# Altium PCB HLK-7621-ALL-KIT-V1.0.PcbDoc (part 2 of 2)
Units mm, origin at the board's own origin, x right, y up, seen from the top; angles counter-clockwise.
Board outline 140 x 100 mm, 2 copper layers (Top Layer, Bottom Layer); 111 components, 238 nets, 733 pads, 557 vias.
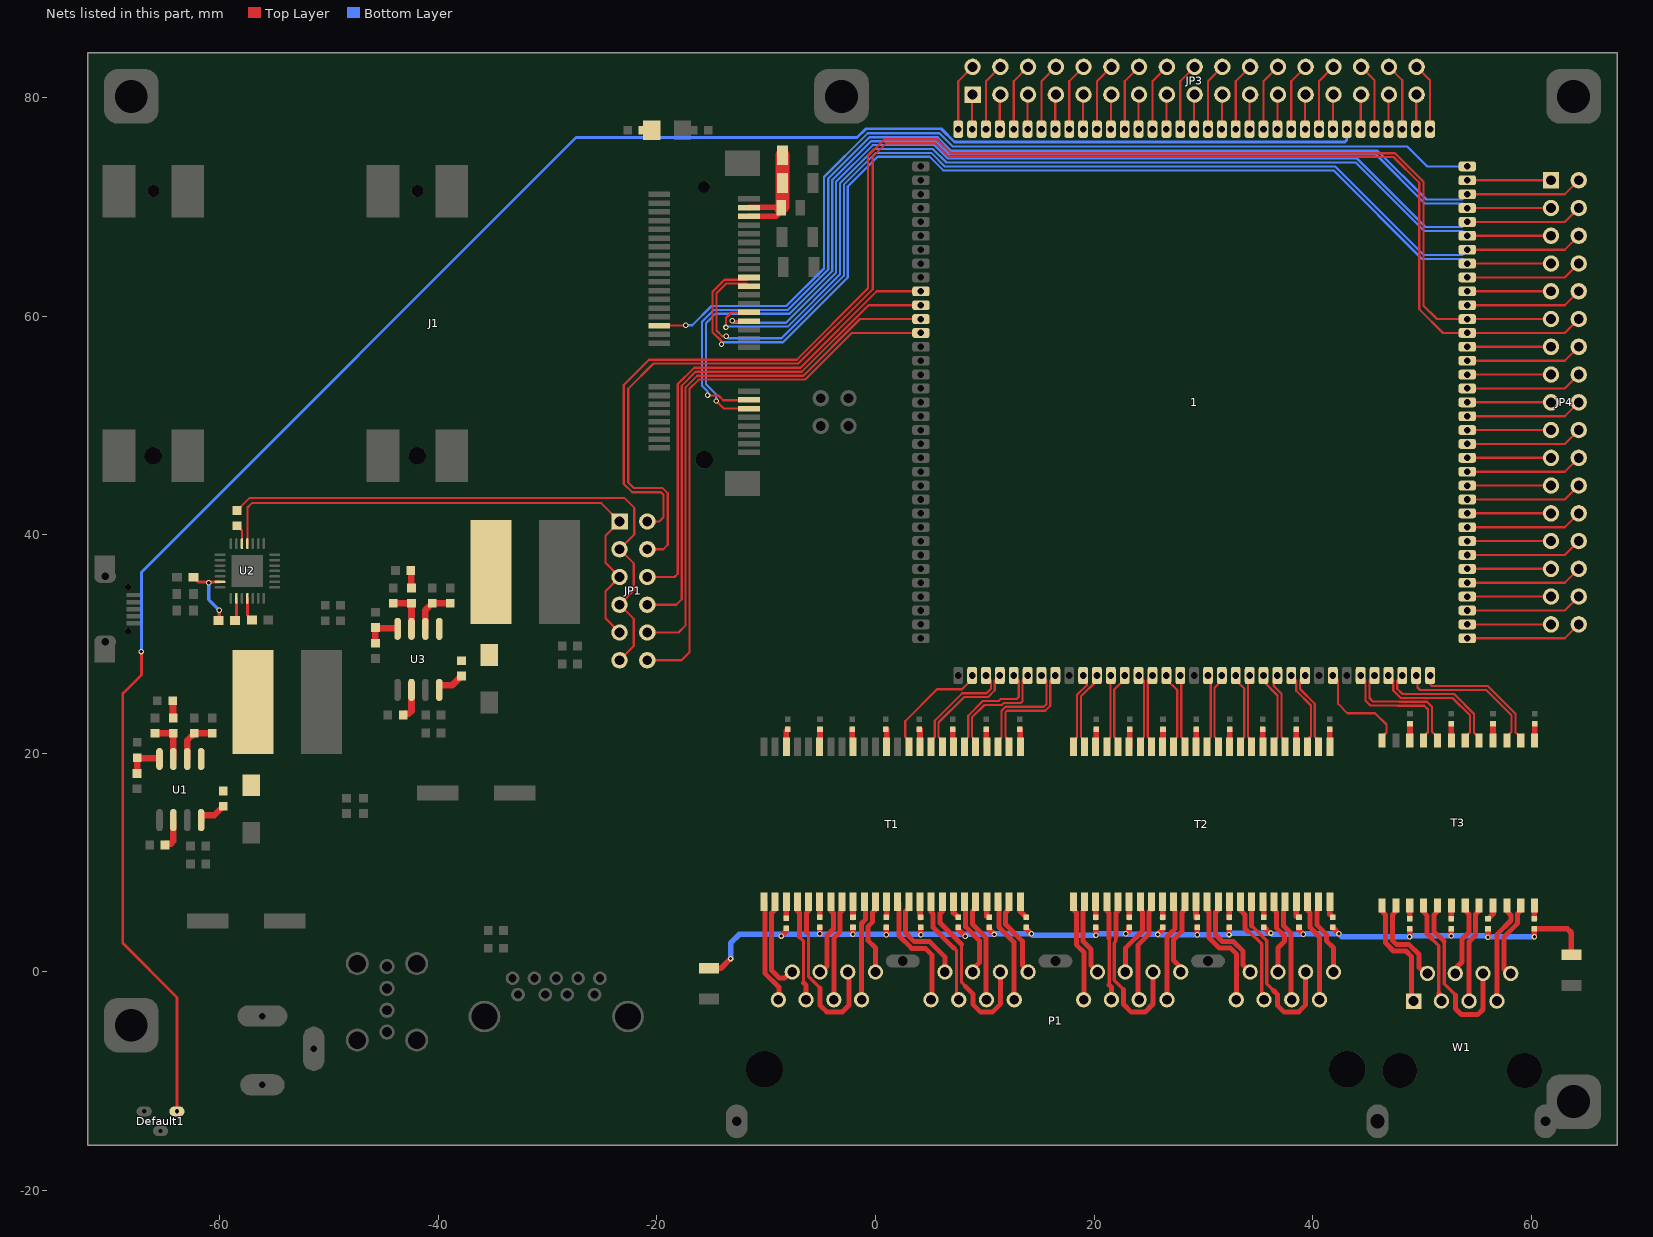
[diagram p2: the nets of this part, all layers, seen from the top]

## Via types
v1: diameter 0.5, hole 0.3, Top Layer to Bottom Layer, tented both sides, 557 vias

## Nets (pads, with @x,y where several pads share a name; then routed paths per layer and width w, separated by ;. In a path a pad name is that pad's centre, name@x,y a point inside that pad or via, vN(x,y) a via of type N, cw(c..) or ccw(c..) an arc to the next point about the centre after c; other vN are vias at no path point) (continued)
Net1_37: 1.37 T1.11 | length 10.5
  Top Layer w0.203: T1.11@3.054,20.613 3.054,21.188 2.717,21.525 2.717,22.948 5.636,25.867 7.924,25.867 8.842,26.785 1.37@8.842,27.135
Net1_38: 1.38 T1.9 | length 10.3
  Top Layer w0.203: T1.9@5.094,20.613 5.094,21.167 5.421,21.494 5.421,22.985 7.948,25.512 10.157,25.512 10.564,25.918 10.564,26.683 1.38@10.112,27.135
Net1_39: 1.39 T1.8 | length 10.3
  Top Layer w0.203: T1.8@6.114,20.613 6.114,21.188 5.777,21.525 5.777,22.838 8.095,25.156 10.305,25.156 10.924,25.776 10.924,26.678 1.39@11.382,27.135
Net1_40: 1.40 T1.6 | length 10.5
  Top Layer w0.203: T1.6@8.154,20.613 8.154,21.167 8.481,21.494 8.481,23.454 9.827,24.801 11.285,24.801 11.463,24.978 12.921,24.978 13.104,25.161 13.104,26.683 1.40@12.652,27.135
Net1_41: 1.41 T1.5 | length 10.6
  Top Layer w0.203: T1.5@9.174,20.613 9.174,21.188 8.837,21.525 8.837,23.307 9.975,24.445 11.551,24.445 11.729,24.623 13.306,24.623 13.459,24.777 13.459,26.673 1.41@13.922,27.135
Net1_42: 1.42 T1.3 | length 10.6
  Top Layer w0.203: T1.3@11.214,20.613 11.214,21.167 11.541,21.494 11.541,23.918 11.89,24.267 15.395,24.267 15.644,24.516 15.644,26.683 1.42@15.192,27.135
Net1_43: 1.43 T1.2 | length 10.6
  Top Layer w0.203: T1.2@12.234,20.613 12.234,21.188 11.897,21.525 11.897,23.771 12.037,23.912 15.542,23.912 15.999,24.369 15.999,26.673 1.43@16.462,27.135
Net1_45: 1.45 T2.24 | length 7.2
  Top Layer w0.203: T2.24@18.115,20.613 18.115,21.167 18.442,21.494 18.442,25.364 19.327,26.248 19.327,26.81 1.45@19.002,27.135
Net1_46: 1.46 T2.23 | length 7.3
  Top Layer w0.203: T2.23@19.135,20.613 19.135,21.188 18.798,21.525 18.798,25.211 20.272,26.685 1.46@20.272,27.135
Net1_47: 1.47 T2.21 | length 6.7
  Top Layer w0.203: T2.21@21.175,20.613 21.175,21.167 21.502,21.494 21.502,27.095 1.47@21.542,27.135
Net1_48: 1.48 T2.20 | length 7.1
  Top Layer w0.203: T2.20@22.195,20.613 22.195,21.188 21.858,21.525 21.858,25.858 22.812,26.812 1.48@22.812,27.135
Net1_49: 1.49 T2.18 | length 6.9
  Top Layer w0.203: 1.49@24.082,27.135 24.562,26.655 24.562,21.494 24.235,21.167 T2.18@24.235,20.613
Net1_50: 1.50 T2.17 | length 6.8
  Top Layer w0.203: T2.17@25.255,20.613 25.255,21.188 24.918,21.525 24.918,26.701 1.50@25.352,27.135
Net1_51: 1.51 T2.15 | length 7.1
  Top Layer w0.203: 1.51@26.622,27.135 26.622,26.802 27.622,25.802 27.622,21.494 27.295,21.167 T2.15@27.295,20.613
Net1_52: 1.52 T2.14 | length 6.7
  Top Layer w0.203: 1.52@27.892,27.135 27.978,27.049 27.978,21.525 28.315,21.188 T2.14@28.315,20.613
Net1_54: 1.54 T2.12 | length 6.8
  Top Layer w0.203: T2.12@30.355,20.613 30.355,21.167 30.682,21.494 30.682,26.885 1.54@30.432,27.135
Net1_55: 1.55 T2.11 | length 6.9
  Top Layer w0.203: T2.11@31.375,20.613 31.375,21.188 31.038,21.525 31.038,26.047 31.702,26.711 1.55@31.702,27.135
Net1_56: 1.56 T2.9 | length 7
  Top Layer w0.203: 1.56@32.972,27.135 32.972,26.726 33.742,25.956 33.742,21.494 33.415,21.167 T2.9@33.415,20.613
Net1_57: 1.57 T2.8 | length 6.7
  Top Layer w0.203: 1.57@34.242,27.135 34.098,26.991 34.098,21.525 34.435,21.188 T2.8@34.435,20.613
Net1_58: 1.58 T2.6 | length 7.2
  Top Layer w0.203: 1.58@35.512,27.135 35.512,26.604 36.802,25.314 36.802,21.494 36.475,21.167 T2.6@36.475,20.613
Net1_59: 1.59 T2.5 | length 7.1
  Top Layer w0.203: 1.59@36.782,27.135 36.446,26.8 36.446,26.172 37.158,25.461 37.158,21.525 37.495,21.188 T2.5@37.495,20.613
Net1_60: 1.60 T2.3 | length 7.4
  Top Layer w0.203: 1.60@38.052,27.135 38.504,26.683 38.504,25.745 39.85,24.399 39.85,21.596 39.535,21.281 T2.3@39.535,20.613
Net1_61: 1.61 T2.2 | length 7.4
  Top Layer w0.203: 1.61@39.322,27.135 38.859,26.673 38.859,25.893 40.206,24.547 40.206,21.55 40.555,21.201 T2.2@40.555,20.613
Net1_63: 1.63 T3.12 | length 9.6
  Top Layer w0.203: 1.63@41.862,27.135 41.884,27.135 42.339,26.68 42.339,24.537 43.188,23.688 45.718,23.688 46.759,22.647 46.759,21.914 46.355,21.51 T3.12@46.355,21.19
Net1_65: 1.65 T3.9 | length 11.5
  Top Layer w0.203: 1.65@44.402,27.135 44.854,26.683 44.854,24.831 45.286,24.399 47.76,24.399 47.79,24.369 50.216,24.369 50.569,24.016 50.569,21.972 50.165,21.568 T3.9@50.165,21.19
Net1_66: 1.66 T3.8 | length 11.6
  Top Layer w0.203: 1.66@45.672,27.135 45.209,26.673 45.209,25.072 45.519,24.762 47.9,24.762 47.937,24.724 50.472,24.724 50.924,24.272 50.924,21.99 51.435,21.48 T3.8@51.435,21.19
Net1_67: 1.67 T3.6 | length 12
  Top Layer w0.203: 1.67@46.942,27.135 47.394,26.683 47.394,25.771 48.085,25.08 52.809,25.08 54.404,23.485 54.404,21.939 53.975,21.51 T3.6@53.975,21.19
Net1_68: 1.68 T3.5 | length 12
  Top Layer w0.203: 1.68@48.212,27.135 47.749,26.673 47.749,25.918 48.232,25.436 52.956,25.436 54.785,23.607 54.785,21.897 55.245,21.438 T3.5@55.245,21.19
Net1_69: 1.69 T3.3 | length 13.3
  Top Layer w0.203: 1.69@49.482,27.135 49.598,27.019 49.598,26.03 49.825,25.804 55.895,25.804 58.214,23.485 58.214,21.981 57.785,21.552 T3.3@57.785,21.19
Net1_70: 1.70 T3.2 | length 12.4
  Top Layer w0.203: 1.70@50.752,27.135 50.752,26.35 50.929,26.172 56.03,26.172 58.57,23.632 58.57,21.939 59.055,21.454 T3.2@59.055,21.19
Net1_71: 1.71 JP4.34 | length 10.7
  Top Layer w0.203: 1.71@54.162,30.545 63.091,30.545 JP4.34@64.361,31.815
Net1_72: 1.72 JP4.33 | length 7.7
  Top Layer w0.203: 1.72@54.162,31.815 JP4.33@61.821,31.815
Net1_73: 1.73 JP4.32 | length 10.7
  Top Layer w0.203: 1.73@54.162,33.085 63.091,33.085 JP4.32@64.361,34.355
Net1_74: 1.74 JP4.31 | length 7.7
  Top Layer w0.203: 1.74@54.162,34.355 JP4.31@61.821,34.355
Net1_75: 1.75 JP4.30 | length 10.7
  Top Layer w0.203: 1.75@54.162,35.625 63.091,35.625 JP4.30@64.361,36.895
Net1_76: 1.76 JP4.29 | length 7.7
  Top Layer w0.203: 1.76@54.162,36.895 JP4.29@61.821,36.895
Net1_77: 1.77 JP4.28 | length 10.7
  Top Layer w0.203: 1.77@54.162,38.165 63.091,38.165 JP4.28@64.361,39.435
Net1_78: 1.78 JP4.27 | length 7.7
  Top Layer w0.203: 1.78@54.162,39.435 JP4.27@61.821,39.435
Net1_79: 1.79 JP4.26 | length 10.7
  Top Layer w0.203: 1.79@54.162,40.705 63.091,40.705 JP4.26@64.361,41.975
Net1_80: 1.80 JP4.25 | length 7.7
  Top Layer w0.203: 1.80@54.162,41.975 JP4.25@61.821,41.975
Net1_81: 1.81 JP4.24 | length 10.7
  Top Layer w0.203: 1.81@54.162,43.245 63.091,43.245 JP4.24@64.361,44.515
Net1_82: 1.82 JP4.23 | length 7.7
  Top Layer w0.203: 1.82@54.162,44.515 JP4.23@61.821,44.515
Net1_83: 1.83 JP4.22 | length 10.7
  Top Layer w0.203: 1.83@54.162,45.785 63.091,45.785 JP4.22@64.361,47.055
Net1_84: 1.84 JP4.21 | length 7.7
  Top Layer w0.203: 1.84@54.162,47.055 JP4.21@61.821,47.055
Net1_85: 1.85 JP4.20 | length 10.7
  Top Layer w0.203: 1.85@54.162,48.325 63.091,48.325 JP4.20@64.361,49.595
Net1_86: 1.86 JP4.19 | length 7.7
  Top Layer w0.203: 1.86@54.162,49.595 JP4.19@61.821,49.595
Net1_87: 1.87 JP4.18 | length 10.7
  Top Layer w0.203: 1.87@54.162,50.865 63.091,50.865 JP4.18@64.361,52.135
Net1_88: 1.88 JP4.17 | length 7.7
  Top Layer w0.203: 1.88@54.162,52.135 JP4.17@61.821,52.135
Net1_89: 1.89 JP4.16 | length 10.7
  Top Layer w0.203: 1.89@54.162,53.405 63.091,53.405 JP4.16@64.361,54.675
Net1_90: 1.90 JP4.15 | length 7.7
  Top Layer w0.203: 1.90@54.162,54.675 JP4.15@61.821,54.675
Net1_91: 1.91 JP4.14 | length 10.7
  Top Layer w0.203: 1.91@54.162,55.945 63.091,55.945 JP4.14@64.361,57.215
Net1_92: 1.92 JP4.13 | length 7.7
  Top Layer w0.203: 1.92@54.162,57.215 JP4.13@61.821,57.215
Net1_95: 1.95 JP4.10 | length 10.7
  Top Layer w0.203: 1.95@54.162,61.025 63.091,61.025 JP4.10@64.361,62.295
Net1_96: 1.96 JP4.9 | length 7.7
  Top Layer w0.203: 1.96@54.162,62.295 JP4.9@61.821,62.295
Net1_97: 1.97 JP4.8 | length 10.7
  Top Layer w0.203: 1.97@54.162,63.565 63.091,63.565 JP4.8@64.361,64.835
Net1_104: 1.104 JP4.1 | length 7.7
  Top Layer w0.203: 1.104@54.162,72.455 JP4.1@61.821,72.455
Net1_106: 1.106 JP3.34 | length 6.2
  Top Layer w0.203: JP3.34@49.527,82.84 50.752,81.615 1.106@50.752,77.135
Net1_107: 1.107 JP3.33 | length 3.2
  Top Layer w0.203: 1.107@49.482,77.135 49.482,80.254 JP3.33@49.527,80.3
Net1_108: 1.108 JP3.32 | length 6.2
  Top Layer w0.203: JP3.32@46.987,82.84 48.212,81.615 1.108@48.212,77.135
Net1_109: 1.109 JP3.31 | length 3.2
  Top Layer w0.203: 1.109@46.942,77.135 46.942,80.254 JP3.31@46.987,80.3
Net1_110: 1.110 JP3.30 | length 6.2
  Top Layer w0.203: JP3.30@44.447,82.84 45.672,81.615 1.110@45.672,77.135
Net1_111: 1.111 JP3.29 | length 3.2
  Top Layer w0.203: 1.111@44.402,77.135 44.402,80.254 JP3.29@44.447,80.3
Net1_112: 1.112 Default1.1 | length 180.5
  Top Layer w0.254: v1(-67.186,29.322) -67.186,27.183 -68.882,25.486 -68.882,2.626 -63.928,-2.328 Default1.1@-63.928,-12.471
  Bottom Layer w0.254: v1(-67.186,29.322) -67.186,36.586 -27.409,76.363 -1.695,76.363 -0.882,77.175 6.018,77.175 7.238,75.956 42.954,75.956 43.132,76.134 1.112@43.132,77.135
Net1_113: 1.113 JP3.27 | length 3.2
  Top Layer w0.203: 1.113@41.862,77.135 41.862,80.254 JP3.27@41.907,80.3
Net1_114: 1.114 JP3.28 | length 6.2
  Top Layer w0.203: 1.114@40.592,77.135 40.592,81.524 JP3.28@41.907,82.84
Net1_115: 1.115 JP3.25 | length 3.2
  Top Layer w0.203: 1.115@39.322,77.135 39.322,80.254 JP3.25@39.367,80.3
Net1_116: 1.116 JP3.26 | length 6.2
  Top Layer w0.203: 1.116@38.052,77.135 38.052,81.524 JP3.26@39.367,82.84
Net1_117: 1.117 JP3.23 | length 3.2
  Top Layer w0.203: 1.117@36.782,77.135 36.782,80.254 JP3.23@36.827,80.3
Net1_118: 1.118 JP3.24 | length 6.2
  Top Layer w0.203: 1.118@35.512,77.135 35.512,81.524 JP3.24@36.827,82.84
Net1_119: 1.119 JP3.21 | length 3.2
  Top Layer w0.203: 1.119@34.242,77.135 34.242,80.254 JP3.21@34.287,80.3
Net1_120: 1.120 JP3.22 | length 6.2
  Top Layer w0.203: 1.120@32.972,77.135 32.972,81.524 JP3.22@34.287,82.84
Net1_121: 1.121 JP3.19 | length 3.2
  Top Layer w0.203: 1.121@31.702,77.135 31.702,80.254 JP3.19@31.747,80.3
Net1_122: 1.122 JP3.20 | length 6.2
  Top Layer w0.203: 1.122@30.432,77.135 30.432,81.524 JP3.20@31.747,82.84
Net1_123: 1.123 JP3.17 | length 3.2
  Top Layer w0.203: 1.123@29.162,77.135 29.162,80.254 JP3.17@29.207,80.3
Net1_124: 1.124 JP3.18 | length 6.2
  Top Layer w0.203: 1.124@27.892,77.135 27.892,81.524 JP3.18@29.207,82.84
Net1_125: 1.125 JP3.15 | length 3.2
  Top Layer w0.203: 1.125@26.622,77.135 26.622,80.254 JP3.15@26.667,80.3
Net1_126: 1.126 JP3.16 | length 6.2
  Top Layer w0.203: 1.126@25.352,77.135 25.352,81.524 JP3.16@26.667,82.84
Net1_127: 1.127 JP3.13 | length 3.2
  Top Layer w0.203: 1.127@24.082,77.135 24.082,80.254 JP3.13@24.127,80.3
Net1_128: 1.128 JP3.14 | length 6.2
  Top Layer w0.203: 1.128@22.812,77.135 22.812,81.524 JP3.14@24.127,82.84
Net1_129: 1.129 JP3.11 | length 3.2
  Top Layer w0.203: 1.129@21.542,77.135 21.542,80.254 JP3.11@21.587,80.3
Net1_130: 1.130 JP3.12 | length 6.2
  Top Layer w0.203: 1.130@20.272,77.135 20.272,81.524 JP3.12@21.587,82.84
Net1_131: 1.131 JP3.9 | length 3.2
  Top Layer w0.203: 1.131@19.002,77.135 19.002,80.254 JP3.9@19.047,80.3
Net1_132: 1.132 JP3.10 | length 6.2
  Top Layer w0.203: 1.132@17.732,77.135 17.732,81.524 JP3.10@19.047,82.84
Net1_133: 1.133 JP3.7 | length 3.2
  Top Layer w0.203: 1.133@16.462,77.135 16.462,80.254 JP3.7@16.507,80.3
Net1_134: 1.134 JP3.8 | length 6.2
  Top Layer w0.203: 1.134@15.192,77.135 15.192,81.524 JP3.8@16.507,82.84
Net1_135: 1.135 JP3.5 | length 3.2
  Top Layer w0.203: 1.135@13.922,77.135 13.922,80.254 JP3.5@13.967,80.3
Net1_136: 1.136 JP3.6 | length 6.2
  Top Layer w0.203: 1.136@12.652,77.135 12.652,81.524 JP3.6@13.967,82.84
Net1_137: 1.137 JP3.3 | length 3
  Top Layer w0.203: 1.137@11.382,77.135 11.382,80.025 JP3.3@11.427,80.071
Net1_138: 1.138 JP3.4 | length 6.2
  Top Layer w0.203: 1.138@10.112,77.135 10.112,81.524 JP3.4@11.427,82.84
Net1_139: 1.139 JP3.1 | length 3.2
  Top Layer w0.203: 1.139@8.842,77.135 8.842,80.254 JP3.1@8.887,80.3
Net1_140: 1.140 JP3.2 | length 6.2
  Top Layer w0.203: 1.140@7.572,77.135 7.572,81.524 JP3.2@8.887,82.84
NetC1_1: C1.1 C2.1 U1.3 | length 4
  Top Layer w0.6: C1.1@-65.929,21.84 C2.1@-64.26,21.84 U1.3@-64.26,19.492
NetC2_2: C2.2 R4.2 | length 1.6
  Top Layer w0.6: R4.2@-64.322,24.826 -64.291,24.795 -64.291,23.271 C2.2@-64.26,23.24
NetC3_2: C3.2 R7.1 U2.6 | length 6.5
  Top Layer w0.254: C3.2@-62.413,36.117 -61.997,35.701 U2.6@-59.985,35.701
  Top Layer w0.305: R7.1@-60.115,32.18 -60.051,32.244 v1(-60.051,33.12)
  Bottom Layer w0.305: v1(-61.016,35.634) -61.016,34.085 v1(-60.051,33.12)
NetC8_1: C8.1 U1.8 | length 2.8
  Top Layer w0.6: U1.8@-61.72,13.904 -61.72,14.339 -61.715,14.344 -60.515,14.344 C8.1@-59.688,15.171
NetC8_2: C8.2 L1.2 U1.1 Z1.2
NetC13_1: C13.1 C14.1 U3.3 | length 4
  Top Layer w0.6: C13.1@-44.135,33.753 C14.1@-42.466,33.753 U3.3@-42.466,31.405
NetC14_2: C14.2 R12.2 | length 1.5
  Top Layer w0.6: C14.2@-42.497,35.184 R12.2@-42.497,36.708
NetC17_1: C17.1 U3.8 | length 2.4
  Top Layer w0.6: U3.8@-39.922,26.256 -38.722,26.256 C17.1@-37.894,27.084
NetC17_2: C17.2 L2.2 U3.1 Z2.2
NetC23_1: C23.1 C47.1 R19.1 R20.1 R21.1 R22.1 R23.1 R24.1 R25.1 R26.1 R27.1 R28.1 R29.1 R30.1 R31.1 R32.1 R33.1 R34.1 R35.1 R36.1 R37.1 R38.1 | length 99
  Top Layer w0.508: C23.1@-15.243,0.34 -14.15,0.34 v1(-13.261,1.229) ; v1(-8.634,3.287) -8.166,3.754 R19.1@-8.166,4.005 ; v1(-5.108,3.49) R20.1@-5.108,4.1 ; v1(-2.06,3.465) R21.1@-2.06,4.1 ; v1(0.988,3.414) R22.1@0.988,4.1 ; v1(4.163,3.415) R23.1@4.163,4.1 ; R24.1@7.567,4.1 7.567,3.922 v1(8.227,3.261) ; R25.1@10.411,4.1 10.411,3.896 v1(10.869,3.439) ; R26.1@13.79,4.1 13.79,3.973 v1(14.272,3.49) ; v1(20.175,3.373) R27.1@20.175,4.1 ; v1(22.908,3.49) 23.223,3.805 R28.1@23.223,4.1 ; v1(25.829,3.439) 26.271,3.881 R29.1@26.271,4.1 ; v1(29.446,3.399) R30.1@29.446,4.1 ; v1(32.36,3.429) 32.36,4.092 R31.1@32.367,4.1 ; R32.1@35.542,4.1 36.076,3.566 v1(36.195,3.566) ; R33.1@38.758,4.1 38.758,3.857 v1(39.151,3.465) ; R34.1@41.857,4.1 41.857,4.049 v1(42.415,3.49) ; v1(48.877,3.222) R35.1@48.877,3.947 ; v1(52.687,3.302) R36.1@52.687,3.947 ; v1(56.055,3.185) R37.1@56.055,3.947 ; v1(60.307,3.219) R38.1@60.307,3.947 63.32,3.947 63.675,3.592 C47.1@63.675,1.578
  Bottom Layer w0.508: v1(-13.261,1.229) -13.261,2.647 -12.469,3.439 -8.634,3.439 -5.108,3.439 -2.06,3.439 0.988,3.439 4.163,3.439 8.227,3.439 v1(10.869,3.439) 10.919,3.49 v1(14.272,3.49) 14.389,3.373 v1(20.175,3.373) 20.292,3.49 v1(22.908,3.49) 22.959,3.439 v1(25.829,3.439) 25.87,3.399 v1(29.446,3.399) 29.477,3.429 v1(32.36,3.429) 32.497,3.566 v1(36.195,3.566) 36.297,3.465 v1(39.151,3.465) 39.176,3.49 v1(42.415,3.49) 42.683,3.222 v1(48.877,3.222) 48.957,3.302 v1(52.687,3.302) 55.939,3.302 v1(56.055,3.185) 56.089,3.219 v1(60.307,3.219)
NetC27_2: C27.2 T1.22 | length 2.6
  Top Layer w0.508: -8.166,21.56 T1.22@-8.166,20.613 -8.166,22.06 C27.2@-8.018,22.208
NetC28_2: C28.2 T1.19 | length 1.6
  Top Layer w0.508: T1.19@-5.106,20.613 -5.08,20.613 C28.2@-5.08,22.208
NetC29_2: C29.2 T1.16 | length 1.7
  Top Layer w0.508: C29.2@-2.108,22.208 -2.108,20.613 T1.16@-2.046,20.613
NetC30_2: C30.2 T1.13 | length 1.7
  Top Layer w0.508: C30.2@0.94,22.208 1.014,22.208 T1.13@1.014,20.613
NetC31_2: C31.2 T1.10 | length 1.7
  Top Layer w0.508: C31.2@3.988,22.208 4.074,22.208 T1.10@4.074,20.613
NetC32_2: C32.2 T1.7 | length 1.6
  Top Layer w0.508: C32.2@7.087,22.208 7.087,20.613 T1.7@7.134,20.613
NetC33_2: C33.2 T1.4 | length 1.7
  Top Layer w0.508: C33.2@10.135,22.208 10.135,20.613 T1.4@10.194,20.613
NetC34_2: C34.2 T1.1 | length 1.7
  Top Layer w0.508: C34.2@13.183,22.208 13.254,22.208 T1.1@13.254,20.613
NetC35_2: C35.2 T2.22 | length 1.7
  Top Layer w0.508: T2.22@20.155,20.613 20.218,20.613 C35.2@20.218,22.208
NetC36_2: C36.2 T2.19 | length 1.6
  Top Layer w0.508: T2.19@23.215,20.613 23.266,20.613 C36.2@23.266,22.208
NetC37_2: C37.2 T2.16 | length 1.6
  Top Layer w0.508: T2.16@26.275,20.613 26.314,20.613 C37.2@26.314,22.208
NetC38_2: C38.2 T2.13 | length 1.6
  Top Layer w0.508: T2.13@29.335,20.613 29.362,20.613 C38.2@29.362,22.208
NetC39_2: C39.2 T2.10 | length 1.6
  Top Layer w0.508: T2.10@32.395,20.613 32.41,20.613 C39.2@32.41,22.208
NetC40_2: C40.2 T2.7 | length 1.6
  Top Layer w0.508: T2.7@35.455,20.613 35.458,20.613 C40.2@35.458,22.208
NetC41_2: C41.2 T2.4 | length 1.6
  Top Layer w0.508: C41.2@38.506,22.208 38.506,20.613 T2.4@38.515,20.613
NetC42_2: C42.2 T2.1 | length 1.6
  Top Layer w0.508: C42.2@41.554,22.208 41.554,20.613 T2.1@41.575,20.613
NetC43_2: C43.2 T3.10 | length 1.6
  Top Layer w0.508: T3.10@48.895,21.19 48.92,21.19 C43.2@48.92,22.716
NetC44_2: C44.2 T3.7 | length 1.5
  Top Layer w0.508: T3.7@52.705,21.19 C44.2@52.705,22.716
NetC45_2: C45.2 T3.4 | length 1.5
  Top Layer w0.508: T3.4@56.515,21.19 C45.2@56.515,22.716
NetC46_2: C46.2 T3.1 | length 1.5
  Top Layer w0.508: T3.1@60.325,21.19 C46.2@60.325,22.716
NetD1_2: D1.2 R15.1 | length 1.5
  Top Layer w0.305: R15.1@-21.271,77.041 D1.2@-19.812,77.041
NetP1_1: P1.1 T1.25 | length 9.6
  Top Layer w0.457: T1.25@-10.206,6.413 -10.127,6.334 -10.127,-0.102 -8.849,-1.38 -8.849,-2.54 P1.1@-8.89,-2.54
NetP1_2: P1.2 T1.26 | length 8.9
  Top Layer w0.457: T1.26@-9.186,6.413 -9.186,5.711 -9.517,5.38 -9.517,0.151 -8.818,-0.549 -8.31,-0.549 -7.691,0.071 P1.2@-7.62,0
NetP1_3: P1.3 T1.28 | length 9.3
  Top Layer w0.305: -6.941,3.19 -6.581,2.83 -6.581,-0.992
  Top Layer w0.457: T1.28@-7.146,6.413 -7.146,5.598 -6.941,5.393 -6.941,3.19 ; -6.581,-0.992 -6.35,-1.223 P1.3@-6.35,-2.54
NetP1_4: P1.4 T1.31 | length 7.1
  Top Layer w0.457: P1.4@-5.08,-0.019 P1.4@-5.08,0 -4.966,0 -4.42,0.547 -4.42,3.36 -3.838,3.941 -3.838,5.35 -4.086,5.598 T1.31@-4.086,6.413
NetP1_5: P1.5 T1.32 | length 9.3
  Top Layer w0.457: P1.5@-3.81,-2.54 -3.81,3.107 -3.228,3.689 -3.228,5.436 -3.066,5.598 T1.32@-3.066,6.413
NetP1_6: P1.6 T1.29 | length 16.4
  Top Layer w0.305: -6.331,3.621 -6.124,3.414 -6.124,-0.422 -5.078,-1.468
  Top Layer w0.457: -6.331,3.621 -6.331,5.393 -6.126,5.598 T1.29@-6.126,6.413 ; -5.078,-1.468 -5.078,-3.044 -4.474,-3.647 -3.027,-3.647 -2.441,-3.062 -2.441,0 P1.6@-2.54,0
NetP1_7: P1.7 T1.34 | length 9.2
  Top Layer w0.457: P1.7@-1.27,-2.54 -1.276,-2.534 -1.276,2.617 -1.273,2.62 -1.273,4.432 -0.892,4.813 -0.892,6.278 T1.34@-1.026,6.413
NetP1_8: P1.8 T1.35 | length 7
  Top Layer w0.457: T1.35@-0.006,6.413 -0.006,5.725 -0.282,5.449 -0.282,4.56 -0.663,4.179 -0.663,2.873 0,2.21 P1.8@0,0
NetP1_9: P1.9 T1.37 | length 11.1
  Top Layer w0.457: T1.37@2.034,6.413 2.156,6.29 2.156,3.317 3.304,2.169 4.555,2.169 5.159,1.565 5.159,-2.54 P1.9@5.08,-2.54
NetP1_10: P1.10 T1.38 | length 8.8
  Top Layer w0.457: T1.38@3.054,6.413 3.054,5.852 2.766,5.564 2.766,3.57 3.557,2.779 4.955,2.779 6.35,1.384 P1.10@6.35,0
NetP1_11: P1.11 T1.40 | length 10
  Top Layer w0.305: 7.175,2.184 7.419,1.941 7.419,-2.339 P1.11@7.62,-2.54
  Top Layer w0.457: T1.40@5.094,6.413 5.094,5.505 5.281,5.319 5.281,4.079 7.175,2.184
NetP1_12: P1.12 T1.43 | length 7.6
  Top Layer w0.457: T1.43@8.154,6.413 8.154,5.725 8.252,5.627 8.252,4.134 9.497,2.889 9.497,0.848 8.89,0.241 P1.12@8.89,0 P1.12@9.284,0
NetP1_13: P1.13 T1.44 | length 9.6
  Top Layer w0.457: T1.44@9.174,6.413 9.174,5.852 8.862,5.54 8.862,4.386 10.107,3.142 10.107,-2.487 P1.13@10.16,-2.54
NetP1_14: P1.14 T1.41 | length 16.7
  Top Layer w0.305: 7.876,2.525 7.876,-0.96 8.227,-1.311
  Top Layer w0.457: T1.41@6.114,6.413 6.114,5.548 5.916,5.35 5.916,4.486 7.876,2.525 ; 8.227,-1.311 8.943,-2.027 8.943,-2.987 9.629,-3.673 10.696,-3.673 11.43,-2.939 P1.14@11.43,0
NetP1_15: P1.15 T1.46 | length 9.6
  Top Layer w0.457: T1.46@11.214,6.413 11.3,6.413 11.3,4.607 11.3,4.102 12.662,2.74 12.662,0.939 12.662,-2.502 P1.15@12.7,-2.54
NetP1_16: P1.16 T1.47 | length 7.4
  Top Layer w0.457: T1.47@12.234,6.413 12.234,5.77 11.91,5.446 11.91,4.355 13.437,2.828 13.437,0.618 14.012,0.042 P1.16@13.97,0
NetP1_17: P1.17 T2.25 | length 9.4
  Top Layer w0.457: T2.25@18.115,6.413 18.115,5.725 18.387,5.453 18.387,2.504 19.091,1.8 19.091,-2.54 P1.17@19.05,-2.54
NetP1_18: P1.18 T2.26 | length 7
  Top Layer w0.457: T2.26@19.135,6.413 19.135,5.725 18.997,5.587 18.997,2.804 19.738,2.063 19.738,0.582 P1.18@20.32,0
NetP1_19: P1.19 T2.28 | length 9.1
  Top Layer w0.305: 21.38,-1.184 21.38,3.058
  Top Layer w0.457: T2.28@21.175,6.413 21.175,5.598 21.38,5.393 21.38,3.058 ; 21.38,-1.184 21.59,-1.393 P1.19@21.59,-2.54
NetP1_20: P1.20 T2.31 | length 7.5
  Top Layer w0.457: P1.20@23.04,0.142 23.04,0 P1.20@22.86,0 22.86,2.172 23.04,2.352 24.44,3.752 24.44,5.52 24.235,5.725 T2.31@24.235,6.413
NetP1_21: P1.21 T2.32 | length 9.5
  Top Layer w0.457: P1.21@24.13,-2.54 24.005,-2.415 24.005,2.455 25.05,3.499 25.05,5.52 25.255,5.725 T2.32@25.255,6.413
NetP1_22: P1.22 T2.29 | length 16.1
  Top Layer w0.305: 21.99,3.185 21.99,2.804 21.846,2.661 21.846,-0.749 22.705,-1.607
  Top Layer w0.457: 21.99,3.185 21.99,5.393 22.195,5.598 T2.29@22.195,6.413 ; 22.705,-1.607 22.705,-2.962 23.416,-3.673 24.661,-3.673 25.4,-2.934 P1.22@25.4,0
NetP1_23: P1.23 T2.34 | length 9.3
  Top Layer w0.457: P1.23@26.67,-2.54 26.667,-2.537 26.667,3.211 27.025,3.568 27.429,3.973 27.429,5.591 27.295,5.725 T2.34@27.295,6.413
NetP1_24: P1.24 T2.35 | length 7.2
  Top Layer w0.457: P1.24@27.94,-0.041 P1.24@27.94,0 27.94,0.419 27.277,1.082 27.277,2.958 28.039,3.72 28.039,5.449 28.315,5.725 T2.35@28.315,6.413
NetP1_25: P1.25 T2.37 | length 10.7
  Top Layer w0.457: T2.37@30.355,6.413 30.355,5.644 30.528,5.471 30.528,3.136 31.29,2.374 31.48,2.184 32.501,2.184 33.02,1.665 P1.25@33.02,-2.54
NetP1_26: P1.26 T2.38 | length 8.5
  Top Layer w0.457: T2.38@31.375,6.413 31.461,6.413 31.461,5.794 31.138,5.471 31.138,3.388 31.732,2.794 32.753,2.794 33.657,1.89 33.657,0.633 P1.26@34.29,0
NetP1_27: P1.27 T2.40 | length 10.1
  Top Layer w0.305: 34.111,3.693 34.226,3.693 35.354,2.564 35.354,-2.334 P1.27@35.56,-2.54
  Top Layer w0.457: T2.40@33.415,6.413 33.415,5.637 33.825,5.227 33.825,3.979 34.111,3.693 ; P1.27@35.354,-2.54 P1.27@35.56,-2.54
NetP1_28: P1.28 T2.43 | length 7.1
  Top Layer w0.457: T2.43@36.475,6.413 36.475,5.725 36.722,5.478 36.722,4.01 37.437,3.295 37.437,2.817 36.83,2.21 P1.28@36.83,0
NetP1_29: P1.29 T2.44 | length 9.3
  Top Layer w0.457: T2.44@37.495,6.413 37.495,5.751 37.332,5.587 37.332,4.262 38.047,3.547 38.047,-2.487 P1.29@38.1,-2.54
NetP1_30: P1.30 T2.41 | length 16.6
  Top Layer w0.305: 34.435,4.231 35.811,2.855 35.811,-1.082 36.421,-1.692
  Top Layer w0.457: 34.435,4.231 T2.41@34.435,6.413 ; 36.421,-1.692 36.802,-2.073 36.802,-3.084 37.365,-3.647 38.738,-3.647 39.342,-3.043 39.342,-0.028 P1.30@39.37,0
NetP1_31: P1.31 T2.46 | length 9.4
  Top Layer w0.457: T2.46@39.535,6.413 39.535,5.656 39.78,5.41 39.78,4.064 40.64,3.205 P1.31@40.64,-2.54
NetP1_32: P1.32 T2.47 | length 7.1
  Top Layer w0.457: T2.47@40.555,6.413 40.555,5.731 40.39,5.566 40.39,4.317 41.254,3.452 41.254,2.865 41.91,2.21 P1.32@41.91,0
NetR1_2: R1.2 R2.2 U1.4 | length 3.6
  Top Layer w0.6: R1.2@-67.587,18.16 -67.574,18.173 -67.574,19.606 R2.2@-67.562,19.619 -67.498,19.555 -65.534,19.555 -65.53,19.551 U1.4@-65.53,19.492
NetR3_2: R3.2 U1.6 | length 2.8
  Top Layer w0.6: R3.2@-65.022,11.618 -64.922,11.718 -64.511,11.718 -64.26,11.969 U1.6@-64.26,13.904
NetR5_2: R5.2 R6.1 U1.2 | length 4.3
  Top Layer w0.6: U1.2@-62.99,19.492 -62.988,19.494 -62.988,21.207 R5.2@-62.355,21.84 R6.1@-60.704,21.84
NetR7_2: R7.2 U2.9 | length 2.1
  Top Layer w0.254: R7.2@-58.615,32.18 -58.485,32.31 U2.9@-58.485,34.201
NetR8_2: R8.2 U2.11 | length 2.2
  Top Layer w0.254: U2.11@-57.485,34.201 -57.485,32.618 R8.2@-57.073,32.205
NetR9_2: R9.2 R10.2 U3.4 | length 3.4
  Top Layer w0.6: R9.2@-45.781,30.085 R10.2@-45.781,31.519 ; R10.2@-45.705,31.468 U3.4@-43.741,31.468
NetR11_2: R11.2 U3.6 | length 2.7
  Top Layer w0.6: R11.2@-43.128,23.631 -42.718,23.631 -42.466,23.882 U3.6@-42.466,25.817
NetR13_2: R13.2 R14.1 U3.2 | length 4.3
  Top Layer w0.6: U3.2@-41.195,31.406 -41.195,33.119 R13.2@-40.561,33.753 R14.1@-38.91,33.753
NetR19_2: R19.2 T1.27 | length 1.5
  Top Layer w0.508: R19.2@-8.166,4.919 T1.27@-8.166,6.413
NetR20_2: R20.2 T1.30 | length 2.9
  Top Layer w0.381: T1.30@-5.207,6.413 T1.30@-5.106,6.413
  Top Layer w0.508: R20.2@-5.108,5.014 R20.2@-5.106,5.016 ; R20.2@-5.106,5.016 T1.30@-5.106,6.413 R20.2@-5.106,5.016
NetR21_2: R21.2 T1.33 | length 1.5
  Top Layer w0.508: R21.2@-2.06,4.963 -2.06,6.413 T1.33@-2.046,6.413
NetR22_2: R22.2 T1.36 | length 1.4
  Top Layer w0.102: T1.36@0.98,6.387 T1.36@1.014,6.413
  Top Layer w0.508: R22.2@1.014,5.014 T1.36@1.014,6.413
NetR23_2: R23.2 T1.39 | length 1.6
  Top Layer w0.508: R23.2@4.036,4.963 4.074,4.979 R23.2@4.074,5.103 ; T1.39@4.074,6.413 R23.2@4.074,5.103 ; R23.2@4.163,5.014 R23.2@4.074,5.103
NetR24_2: R24.2 T1.42 | length 1.6
  Top Layer w0.508: T1.42@7.134,6.413 7.134,5.447 R24.2@7.567,5.014
NetR25_2: R25.2 T1.45 | length 2.8
  Top Layer w0.508: R25.2@10.164,5.122 10.166,5.12 10.166,6.413 T1.45@10.194,6.413 10.194,5.231 R25.2@10.411,5.014
NetR26_2: R26.2 T1.48 | length 1.6
  Top Layer w0.508: T1.48@13.254,6.413 13.254,5.55 R26.2@13.79,5.014
NetR27_2: R27.2 T2.27 | length 1.5
  Top Layer w0.381: T2.27@20.066,6.413 T2.27@20.155,6.413
  Top Layer w0.508: T2.27@20.155,6.413 20.155,4.973 R27.2@20.165,4.963
NetR28_2: R28.2 T2.30 | length 1.5
  Top Layer w0.381: T2.30@23.213,6.413 T2.30@23.215,6.413
  Top Layer w0.508: R28.2@23.213,4.963 T2.30@23.213,6.413
NetR29_2: R29.2 T2.33 | length 1.5
  Top Layer w0.102: T2.33@26.259,6.399 T2.33@26.275,6.413
  Top Layer w0.508: R29.2@26.261,4.963 26.275,4.977 T2.33@26.275,6.413
NetR30_2: R30.2 T2.36 | length 1.6
  Top Layer w0.381: T2.36@29.335,6.413 T2.36@29.464,6.413
  Top Layer w0.508: R30.2@29.309,4.963 29.335,4.989 T2.36@29.335,6.413
NetR31_2: R31.2 T2.39 | length 1.5
  Top Layer w0.102: T2.39@32.367,6.375 T2.39@32.395,6.413
  Top Layer w0.381: T2.39@32.385,6.413 T2.39@32.395,6.413
  Top Layer w0.508: R31.2@32.357,4.963 32.395,5.001 T2.39@32.395,6.413
NetR32_2: R32.2 T2.42 | length 1.4
  Top Layer w0.508: T2.42@35.455,6.413 35.532,6.413 R32.2@35.532,5.09
NetR33_2: R33.2 T2.45 | length 1.6
  Top Layer w0.508: R33.2@38.515,5.116 R33.2@38.515,5.257 ; T2.45@38.515,6.413 R33.2@38.515,5.257 ; R33.2@38.758,5.014 R33.2@38.515,5.257
NetR34_2: R34.2 T2.48 | length 2.7
  Top Layer w0.102: T2.48@41.575,6.413 T2.48@41.679,6.36
  Top Layer w0.508: R34.2@41.857,5.014 41.575,5.296 ; 41.575,5.296 T2.48@41.575,6.413 41.575,5.296
NetR35_2: R35.2 T3.15 | length 1.2
  Top Layer w0.508: R35.2@48.877,4.862 48.877,6.072 T3.15@48.895,6.09
NetR36_2: R36.2 T3.18 | length 1.4
  Top Layer w0.102: R36.2@52.705,4.712 R36.2@52.705,4.862
  Top Layer w0.508: R36.2@52.677,4.836 R36.2@52.695,4.854 ; R36.2@52.687,4.862 52.687,6.072 T3.18@52.705,6.09
NetR37_2: R37.2 T3.21 | length 1.4
  Top Layer w0.508: R37.2@56.055,4.862 56.515,5.321 T3.21@56.515,6.09
NetR38_2: R38.2 T3.24 | length 1.4
  Top Layer w0.102: R38.2@60.325,4.862 60.325,4.772 R38.2@60.368,4.73
  Top Layer w0.508: R38.2@60.297,4.836 R38.2@60.315,4.854 ; R38.2@60.307,4.862 60.307,6.072 T3.24@60.325,6.09
NetR39_2: R39.2 U2.26 | length 1.8
  Top Layer w0.2: R39.2@-58.443,40.839 -57.985,40.382 U2.26@-57.985,39.201
NetT3_13: T3.13 W1.1 | length 10.7
  Top Layer w0.457: T3.13@46.355,6.09 46.355,5.547 46.685,5.217 46.685,2.65 47.409,1.926 48.558,1.926 49.075,1.409 49.075,-2.614 W1.1@49.022,-2.667 ; W1.1@49.092,-2.665 W1.1@49.251,-2.665
NetT3_14: T3.14 W1.2 | length 8.6
  Top Layer w0.457: T3.14@47.625,6.09 47.625,5.547 47.295,5.217 47.295,2.903 47.662,2.535 48.811,2.535 49.736,1.61 49.736,0.429 W1.2@50.292,-0.127 ; W1.2@50.521,-0.125 W1.2@50.777,-0.382
NetT3_16: T3.16 W1.3 | length 9.3
  Top Layer w0.305: 50.928,3.058 51.562,2.424 51.562,-1.905
  Top Layer w0.457: T3.16@50.165,6.09 50.165,5.471 50.495,5.141 50.495,3.491 50.928,3.058 ; W1.3@51.562,-2.667 51.562,-1.905
NetT3_17: T3.17 W1.6 | length 16.7
  Top Layer w0.305: 52.045,2.803 52.045,-1.067 53.061,-2.083
  Top Layer w0.457: T3.17@51.435,6.09 51.435,5.547 51.105,5.217 51.105,3.743 52.045,2.803 ; 53.061,-2.083 53.061,-3.333 53.639,-3.912 55.118,-3.912 55.601,-3.429 55.601,-0.356 W1.6@55.372,-0.127
NetT3_19: T3.19 W1.4 | length 7
  Top Layer w0.457: W1.4@52.832,-0.127 52.832,-0.125 52.832,0.084 53.67,0.922 53.67,2.984 54.305,3.619 54.305,5.293 53.975,5.624 T3.19@53.975,6.09 ; W1.4@53.029,-0.093 W1.4@53.061,-0.125
NetT3_20: T3.20 W1.5 | length 9.2
  Top Layer w0.457: W1.5@54.102,-2.667 54.331,-2.438 54.331,2.783 54.915,3.367 54.915,5.293 55.245,5.624 T3.20@55.245,6.09
NetT3_22: T3.22 W1.7 | length 9.5
  Top Layer w0.457: W1.7@56.642,-2.667 56.896,-2.413 56.896,3.442 58.163,4.709 58.163,5.194 57.785,5.573 T3.22@57.785,6.09
NetT3_23: T3.23 W1.8 | length 7
  Top Layer w0.457: W1.8@57.912,-0.127 57.506,0.279 57.506,3.189 58.773,4.457 58.773,4.962 58.773,5.342 59.055,5.624 T3.23@59.055,6.09
PCIE0_5V: C24.1 C25.1 J1.47 J1.49 R17.1 | length 11.3
  Top Layer w0.508: J1.47@-11.583,69.162 -9.121,69.162 -8.634,69.649 R17.1@-8.634,69.929 -8.634,69.977 -11.569,69.977 J1.49@-11.583,69.962
  Top Layer w1.27: R17.1@-8.634,69.929 -8.524,70.039 C24.1@-8.524,72.215 C25.1@-8.524,74.755
PCIE_CK2_M: 1.102 J1.11 JP4.3 | length 102.4
  Top Layer w0.203: v1(-14.577,52.258) -13.882,51.562 J1.11@-11.583,51.562 ; 1.102@54.162,69.915 JP4.3@61.821,69.915
  Bottom Layer w0.203: v1(-14.577,52.258) -14.577,52.862 -15.517,53.802 -15.517,59.37 -14.653,60.234 -7.877,60.234 -3.96,64.15 -3.96,72.481 -0.409,76.032 5.545,76.032 6.764,74.813 45.804,74.813 50.274,70.343 53.734,70.343 1.102@54.162,69.915
PCIE_CK2_P: 1.103 J1.13 JP4.2 | length 106.1
  Top Layer w0.203: v1(-15.365,52.791) -15.335,52.762 -14.368,52.762 -13.941,52.334 -11.612,52.334 J1.13@-11.583,52.362 ; 1.103@54.162,71.185 63.091,71.185 JP4.2@64.361,72.455
  Bottom Layer w0.203: v1(-15.365,52.791) -15.365,53.147 -15.873,53.655 -15.873,59.517 -14.801,60.589 -8.024,60.589 -4.316,64.297 -4.316,72.629 -0.556,76.388 5.692,76.388 6.911,75.169 45.951,75.169 50.421,70.698 53.675,70.698 1.103@54.162,71.185
PCIE_RX2_M: 1.101 J1.23 JP4.4 | length 94.5
  Top Layer w0.203: v1(-13.104,59.599) -13.068,59.562 J1.23@-11.583,59.562 ; 1.101@54.162,68.645 63.091,68.645 JP4.4@64.361,69.915
  Bottom Layer w0.203: v1(-13.104,59.599) -12.926,59.421 -8.186,59.421 -3.604,64.003 -3.604,72.334 -0.262,75.677 5.398,75.677 6.617,74.458 44.071,74.458 50.345,68.184 53.7,68.184 1.101@54.162,68.645
PCIE_RX2_P: 1.100 J1.25 JP4.5 | length 93.6
  Top Layer w0.203: v1(-13.688,58.989) -13.688,59.853 -13.178,60.362 J1.25@-11.583,60.362 ; 1.100@54.162,67.375 JP4.5@61.821,67.375
  Bottom Layer w0.203: v1(-13.688,58.989) -13.612,59.065 -8.039,59.065 -3.249,63.856 -3.249,72.187 -0.114,75.321 5.25,75.321 6.495,74.077 43.95,74.077 50.198,67.828 53.709,67.828 1.100@54.162,67.375
PCIE_TX2_M: 1.98 J1.33 JP4.7 | length 101
  Top Layer w0.203: v1(-14.095,57.44) -14.095,57.744 -14.907,58.557 -14.907,62.266 -13.815,63.358 -11.788,63.358 J1.33@-11.583,63.562 ; 1.98@54.162,64.835 JP4.7@61.821,64.835
  Bottom Layer w0.203: v1(-14.095,57.44) -13.891,57.643 -8.456,57.643 -2.538,63.561 -2.538,71.892 0.18,74.61 4.956,74.61 6.2,73.365 41.918,73.365 50.02,65.263 53.734,65.263 1.98@54.162,64.835
PCIE_TX2_P: 1.99 J1.31 JP4.6 | length 102.6
  Top Layer w0.203: v1(-13.663,58.176) -14.023,58.176 -14.552,58.704 -14.552,62.118 -13.668,63.002 -11.823,63.002 J1.31@-11.583,62.762 ; 1.99@54.162,66.105 63.091,66.105 JP4.6@64.361,67.375
  Bottom Layer w0.203: v1(-13.663,58.176) -13.485,57.998 -8.603,57.998 -2.893,63.708 -2.893,72.039 0.033,74.966 5.103,74.966 6.348,73.721 42.065,73.721 50.167,65.618 53.675,65.618 1.99@54.162,66.105
PERST_N: 1.105 J1.22 | length 87.4
  Top Layer w0.203: J1.22@-19.783,59.162 -17.401,59.162 v1(-17.371,59.192)
  Bottom Layer w0.203: v1(-17.371,59.192) -16.762,59.192 -15.009,60.945 -8.171,60.945 -4.722,64.394 -4.722,72.761 -0.714,76.769 5.85,76.769 7.069,75.55 48.664,75.55 50.488,73.725 1.105@54.162,73.725
RX0_CP2102: JP1.1 JP1.5 JP1.9 U2.25 | length 50.5
  Top Layer w0.2: U2.25@-57.485,39.201 -57.466,39.221 -57.466,42.517 -57.071,42.911 -25.098,42.911 JP1.1@-23.421,41.234 -24.717,39.939 -24.717,37.45 JP1.5@-23.421,36.154 -24.717,34.859 -24.717,32.37 JP1.9@-23.421,31.074
RXD2: 1.11 JP1.8 | length 47.8
  Top Layer w0.203: JP1.8@-20.881,33.614 -18.235,33.614 -17.732,34.117 -17.732,53.665 -16.472,54.925 -6.742,54.925 -0.642,61.025 1.11@4.162,61.025
RXD3: 1.13 JP1.12 | length 51.6
  Top Layer w0.203: JP1.12@-20.881,28.534 -20.754,28.534 -17.752,28.534 -17.021,29.266 -17.021,53.371 -16.177,54.214 -6.448,54.214 -2.177,58.485 1.13@4.162,58.485
TX0_CP2102: JP1.3 JP1.7 JP1.11 R39.1 | length 53.8
  Top Layer w0.2: R39.1@-58.367,42.301 -57.275,43.393 -22.99,43.393 -22.075,42.479 -22.075,40.041 JP1.3@-23.421,38.694 -22.126,37.399 -22.126,34.91 JP1.7@-23.421,33.614 -22.126,32.319 -22.126,29.83 JP1.11@-23.421,28.534
TXD2: 1.10 JP1.6 | length 46
  Top Layer w0.203: JP1.6@-20.881,36.154 -18.387,36.154 -18.087,36.454 -18.087,53.812 -16.594,55.306 -6.864,55.306 0.125,62.295 1.10@4.162,62.295
TXD3: 1.12 JP1.10 | length 49.7
  Top Layer w0.203: JP1.10@-20.881,31.074 -18.032,31.074 -17.376,31.73 -17.376,53.518 -16.325,54.569 -6.595,54.569 -1.409,59.755 1.12@4.162,59.755
UART0_RXD: 1.93 JP1.4 JP4.12 | length 137.2
  Top Layer w0.203: JP1.4@-20.881,38.694 -19.429,38.694 -19.022,39.101 -19.022,43.825 -19.505,44.308 -22.146,44.308 -22.634,44.795 -22.634,53.371 -20.318,55.687 -7.059,55.687 -0.252,62.494 -0.252,74.61 0.993,75.855 5.463,75.855 6.733,74.585 47.404,74.585 49.761,72.227 49.761,60.665 51.941,58.485 1.93@54.162,58.485 63.091,58.485 JP4.12@64.361,59.755
UART0_TXD: 1.94 JP1.2 JP4.11 | length 131.6
  Top Layer w0.203: JP1.2@-20.881,41.234 -19.784,41.234 -19.403,41.615 -19.403,43.673 -19.632,43.901 -22.273,43.901 -23.04,44.668 -23.04,53.726 -20.724,56.043 -7.206,56.043 -0.683,62.565 -0.683,74.712 0.815,76.21 5.616,76.21 6.886,74.94 47.551,74.94 50.142,72.349 50.142,60.996 51.382,59.755 1.94@54.162,59.755 JP4.11@61.821,59.755
pads on no net: J1.1 J1.3 J1.5 J1.6 J1.7 J1.8 J1.10 J1.12 J1.14 J1.16 J1.17 J1.19 J1.20 J1.28 J1.30 J1.32 J1.36 J1.38 J1.45 J1.51 J1.53 J1.54 J1.61 J1.62 J1.67 J1.68 P1.33 P1.34 U2.1 U2.2 U2.10 U2.12 U2.13 U2.14 U2.15 U2.16 U2.17 U2.18 U2.19 U2.20 U2.21 U2.22 U2.23 U2.24 U2.27 U2.28 USB1.2 W1. W1.9

## Polygon pours and split planes (outlines as drawn)
GND on Top Layer "Top Layer-No Net" (solid, remove dead copper, pour order 12): -14.608,-15.865 -14.608,-9.365 -15.608,-9.365 -16.358,-9.365 -16.358,-4.181 -16.358,-1.115 -15.358,-1.115 -12.798,-1.115 -12.798,-2.468 -12.798,-10.496 -6.35,-10.496 61.142,-10.496 61.142,-6.365 61.142,-1.115 62.441,-1.115 67.892,-1.115 67.892,-1.365 67.892,-15.865 65.892,-15.865 -14.608,-15.865 -14.608,-15.789
GND on Top Layer "Top Layer-No Net" (solid, remove dead copper, pour order 14): -13.369,-15.865 -13.369,-0.548 -12.369,-0.548 -12.369,6.477 -12.369,19.66 -5.84,19.66 67.881,19.66 67.881,18.135 67.881,84.135 57.381,84.135 -72.119,84.135 -72.119,74.885 -72.119,-15.865 -71.119,-15.865
5VD_E_G on Bottom Layer "Top Layer-No Net" (solid, remove dead copper, pour order 9): -21.72,69.911 -12.169,69.911 -7.75,65.491 -7.648,65.39 -7.648,62.164 -7.648,61.859 -8.029,61.478 -10.417,61.478 -13.769,64.831 -15.7,66.761 -20.018,66.761 -21.389,66.761 -21.77,67.142 -22.075,67.447 -22.075,68.819 -22.075,69.581 -21.745,69.911
GND on Bottom Layer "Top Layer-No Net" (solid, remove dead copper, pour order 11): -14.608,-15.865 -14.608,-9.365 -15.608,-9.365 -16.358,-9.365 -16.358,-4.181 -16.358,-1.115 -15.358,-1.115 -12.798,-1.115 -12.798,-2.468 -12.798,-10.496 -6.35,-10.496 61.142,-10.496 61.142,-6.365 61.142,-1.115 62.441,-1.115 67.892,-1.115 67.892,-1.365 67.892,-15.865 65.892,-15.865 -14.608,-15.865 -14.608,-15.789
GND on Bottom Layer "Top Layer-No Net" (solid, remove dead copper, pour order 13): -13.394,-15.865 -13.394,-0.548 -12.394,-0.548 -12.394,6.477 -12.394,19.619 -6.119,19.619 67.856,19.619 67.856,18.135 67.856,84.135 57.356,84.135 -72.144,84.135 -72.144,74.885 -72.144,-15.865 -71.144,-15.865

## Keep-outs
Keep-Out Layer:
  the board outline again, w0.203

## Other copper
Top Layer:
  rectangle net NetC17_2: -38.555,28.077 -33.246,32.37
  rectangle net NetC17_2: -39.926,30.414 -36.599,32.37
  rectangle net NetC8_2: -61.72,18.501 -58.392,20.457
  rectangle net NetC8_2: -60.348,16.165 -55.039,20.457
  rectangle net 5V: -60.508,33.78 -59.009,34.72
  rectangle net 5V: -60.457,34.657 -59.484,35.203
  rectangle net 5VD_E_G: -9.858,61.554 -7.699,68.412
  rectangle net 5VD: -7.191,65.923 -4.905,70.698
  pour cut-out: -34.588,41.514 -29.521,41.514 -29.521,31.857 -29.424,31.76 -34.588,31.76 -34.588,41.518 -34.567,41.539
  pour cut-out: -56.381,29.601 -51.315,29.601 -51.315,19.945 -51.217,19.848 -56.381,19.848 -56.381,29.606 -56.36,29.627
  pour cut-out: 47.501,22.05 60.679,22.05 60.679,21.783 47.501,21.783 47.501,22.05
  region net 5VD: -5.092,69.04 -7.53,69.04 -7.53,70.691 -5.092,70.691 -5.092,69.04
  pour cut-out: 47.626,20.394 49.923,20.394 49.923,20.537 47.626,20.537 47.626,20.394
  pour cut-out: 50.444,20.338 60.81,20.338 60.81,20.539 50.444,20.539 50.444,20.338
  pour cut-out: 46.648,20.335 47.518,20.335 47.518,20.452 46.648,20.452 46.648,20.335

## Silkscreen, mask and mechanical layers (free items; w line width, h text height)
Top Overlay:
  lines w0.12: -58.166,15.352 -56.083,15.352 ; -58.013,14.463 -56.312,14.463 -57.124,15.276 ; -57.937,14.539 -57.201,15.276 ; -55.829,11.212 -54.762,11.212 ; -55.27,10.704 -55.27,11.694 ; -36.345,27.188 -34.262,27.188 ; -36.193,26.299 -34.491,26.299 -35.304,27.112 ; -36.116,26.375 -35.38,27.112 ; -34.008,23.048 -32.941,23.048 ; -33.449,22.54 -33.449,23.531
  text "HLK-7621-ALL-KIT-V1.0" at -62.055,79.004 h2
  text "+" at -19.937,77.861 h1 r90
  text "1" at 2.365,74.651 h1
  text "J0" at -66.437,59.258 h0.8
  text "TX0" at -18.971,40.777 h1.02
  text "RX0" at -18.971,38.237 h1.02
  text "TX2" at -18.971,35.697 h1.02
  text "RX2" at -18.971,33.157 h1.02
  text "TX3" at -18.971,30.617 h1.02
  text "RX3" at -18.971,28.077 h1.02
  text "12V" at -58.875,-2.2 h2